# EAGLE board CT_schematic (EAGLE 7.6.0)

Size 100 x 80 mm. Coordinates in mm from the lower left corner, seen from the top.
Outline: 0,0 100,0 100,80 0,80 0,0
Copper layers (1*16): Top 0.035mm / dielectric 1.5mm / Bottom 0.035mm
Design rules "default": minimum track width 10mil, minimum drill 24mil, track to track 8mil, track to pad 8mil, pad to pad 8mil, via to via 8mil, smd to smd 8mil, copper to edge 40mil, drill to drill 8mil, minimum pad ring 10mil, minimum via ring 8mil, stop-mask expansion 4mil, vias tented up to drill 0mil, thermal gap 10mil

## Footprints (pad centres in the part's own frame; a part is rotated, then mirrored left to right if it is on the bottom)
C0603 = smd 0.8 x 0.8: 1 -0.762,0; 2 0.762,0
C0402 = smd 0.5 x 0.5: 1 -0.508,0; 2 0.508,0
C0805 = smd 1.2 x 1.3: 1 -1.016,0; 2 1.016,0
C1206 = smd 1.3 x 1.6: 1 -1.524,0; 2 1.524,0
L0603 = smd 0.8 x 0.8: 1 -0.762,0; 2 0.762,0
L1210 = smd 1.2 x 2.5: 1 -1.524,0; 2 1.524,0
L0806 = smd 1.016 x 1.524: 1 -0.889,0; 2 0.889,0
R0603 = smd 0.8 x 0.8: 1 -0.762,0; 2 0.762,0
UFBGA100 = smd 0.28 x 0.28: A1 -2.75,2.75; A2 -2.25,2.75; A3 -1.75,2.75; A4 -1.25,2.75; A5 -0.75,2.75; A6 -0.25,2.75; A7 0.25,2.75; A8 0.75,2.75; A9 1.25,2.75; A10 1.75,2.75; A11 2.25,2.75; A12 2.75,2.75; B1 -2.75,2.25; B2 -2.25,2.25; B3 -1.75,2.25; B4 -1.25,2.25; B5 -0.75,2.25; B6 -0.25,2.25; B7 0.25,2.25; B8 0.75,2.25; B9 1.25,2.25; B10 1.75,2.25; B11 2.25,2.25; B12 2.75,2.25; C1 -2.75,1.75; C2 -2.25,1.75; C3 -1.75,1.75; C4 -1.25,1.75; C5 -0.75,1.75; C8 0.75,1.75; C9 1.25,1.75; C10 1.75,1.75; C11 2.25,1.75; C12 2.75,1.75; D1 -2.75,1.25; D2 -2.25,1.25; D3 -1.75,1.25; D10 1.75,1.25; D11 2.25,1.25; D12 2.75,1.25; E1 -2.75,0.75; E2 -2.25,0.75; E3 -1.75,0.75; E10 1.75,0.75; E11 2.25,0.75; E12 2.75,0.75; F1 -2.75,0.25; F2 -2.25,0.25; F11 2.25,0.25; F12 2.75,0.25; G1 -2.75,-0.25; G2 -2.25,-0.25; G11 2.25,-0.25; G12 2.75,-0.25; H1 -2.75,-0.75; H2 -2.25,-0.75; H3 -1.75,-0.75; H10 1.75,-0.75; H11 2.25,-0.75; H12 2.75,-0.75; J1 -2.75,-1.25; J2 -2.25,-1.25; J3 -1.75,-1.25; J10 1.75,-1.25; J11 2.25,-1.25; J12 2.75,-1.25; K1 -2.75,-1.75; K2 -2.25,-1.75; K3 -1.75,-1.75; K4 -1.25,-1.75; K5 -0.75,-1.75; K8 0.75,-1.75; K9 1.25,-1.75; K10 1.75,-1.75; K11 2.25,-1.75; K12 2.75,-1.75; L1 -2.75,-2.25; L2 -2.25,-2.25; L3 -1.75,-2.25; L4 -1.25,-2.25; L5 -0.75,-2.25; L6 -0.25,-2.25; L7 0.25,-2.25; L8 0.75,-2.25; L9 1.25,-2.25; L10 1.75,-2.25; L11 2.25,-2.25; L12 2.75,-2.25; M1 -2.75,-2.75; M2 -2.25,-2.75; M3 -1.75,-2.75; M4 -1.25,-2.75; M5 -0.75,-2.75; M6 -0.25,-2.75; M7 0.25,-2.75; M8 0.75,-2.75; M9 1.25,-2.75; M10 1.75,-2.75; M11 2.25,-2.75; M12 2.75,-2.75
SAMTEC_FTSH-105-01-L-DV-K = smd 0.762 x 2.794: 1 -2.54,-2.032; 2 -2.54,2.032; 3 -1.27,-2.032; 4 -1.27,2.032; 5 0,-2.032; 6 0,2.032; 7 1.27,-2.032; 8 1.27,2.032; 9 2.54,-2.032; 10 2.54,2.032
SSOP-20 = smd 1.651 x 0.432: 1 -3.48,2.925; 2 -3.48,2.275; 3 -3.48,1.625; 4 -3.48,0.975; 5 -3.48,0.325; 6 -3.48,-0.325; 7 -3.48,-0.975; 8 -3.48,-1.625; 9 -3.48,-2.275; 10 -3.48,-2.925; 11 3.48,-2.925; 12 3.48,-2.275; 13 3.48,-1.625; 14 3.48,-0.975; 15 3.48,-0.325; 16 3.48,0.325; 17 3.48,0.975; 18 3.48,1.625; 19 3.48,2.275; 20 3.48,2.925
182-009-MALE = drill 1.194 pad 1.524 octagon: 1 -5.537,10.923; 2 -2.769,10.923; 3 0,10.923; 4 2.769,10.923; 5 5.537,10.923; 6 -4.153,8.08; 7 -1.384,8.08; 8 1.384,8.08; 9 4.153,8.08 | hole 3.048: -12.446,9.501; 12.446,9.501
TDFN-8/6MM = smd 0.3 x 0.75: 1 0,0; 2 0.5,0; 3 1,0; 4 1.5,0; 5 1.5,3; 6 1,3; 7 0.5,3; 8 0,3
FCI_10118193-0001LF = smd 0.4 x 1.35: 1 -1.3,2.675; 2 -0.65,2.675; 3 0,2.675; 4 0.65,2.675; 5 1.3,2.675 | smd 1.6 x 1.4: 6 -3.2,2.45; 7 3.2,2.45 | smd 1.9 x 1.9: 8 -1.2,0; 9 1.2,0 | hole 0.5: -3.3,0; 3.3,0
SOT143B = smd 1 x 0.7: 1 -0.75,-1 | smd 0.6 x 0.7: 2 0.95,-1; 3 0.95,1; 4 -0.95,1
ASEK = smd 1.4 x 1: 1 -1.1,-0.8; 2 1.1,-0.8; 3 1.1,0.8; 4 -1.1,0.8
ASFL1 = smd 1.7 x 1.5: 1 -1.27,-1.1; 2 1.27,-1.1; 3 1.27,1.1; 4 -1.27,1.1
TSOT-23-5 = smd 1.3 x 0.62: 1 -1.31,0.95; 2 -1.31,0; 3 -1.31,-0.95; 4 1.31,-0.95; 5 1.31,0.95
DFN8_2X3MC = smd 0.813 x 0.305: 1 -1.398,0.75; 2 -1.398,0.25; 3 -1.398,-0.25; 4 -1.398,-0.75; 5 1.398,-0.75; 6 1.398,-0.25; 7 1.398,0.25; 8 1.398,0.75 | smd 1.753 x 1.549: 9 0,0
JST-2-SMD = smd 1 x 4.6: 1 -1,-3.7; 2 1,-3.7 | smd 1.6 x 3.4: NC1 -3.4,1.5; NC2 3.4,1.5
SON-6 = smd 0.55 x 0.3: 1 -0.355,0.5 | smd 0.52 x 0.3: 2 -0.37,0; 3 -0.37,-0.5; 4 0.37,-0.5; 5 0.37,0; 6 0.37,0.5
SW_4-1437565-2 = smd 1.4 x 2.1: 1 -2.23,4.55; 2 -2.23,-4.55; 3 2.23,4.55; 4 2.23,-4.55
LGM67K-G1J2-24-Z = smd 0.8 x 1.4: A -2,0; C 0,0
NC7SZ125M5X = smd 1.3 x 0.7: 1 -1.3,0.95; 2 -1.3,0; 3 -1.3,-0.95; 4 1.3,-0.95; 5 1.3,0.95

## Placement (x,y rotation side)
C1  1e-07  [C0603]  -48.26,71.12 0 top  (outside the outline)
C2  1e-07  [C0603]  -52.07,71.12 0 top  (outside the outline)
C3  1e-07  [C0603]  -55.88,71.12 0 top  (outside the outline)
C4  1e-07  [C0603]  -59.69,71.12 0 top  (outside the outline)
C5  1e-07  [C0603]  -63.5,71.12 0 top  (outside the outline)
C6  4.7e-06  [C0603]  -44.45,71.12 0 top  (outside the outline)
C7  1e-07  [C0603]  -67.31,71.12 0 top  (outside the outline)
C8  1e-08  [C0603]  -71.12,71.12 0 top  (outside the outline)
C9  1e-06  [C0603]  -15.24,76.2 0 top  (outside the outline)
C10  1e-07  [C0402]  -60.96,76.2 0 top  (outside the outline)
C11  1e-06  [C0603]  -19.05,76.2 0 top  (outside the outline)
C12  1e-06  [C0603]  -22.86,76.2 0 top  (outside the outline)
C13  1e-06  [C0603]  -26.67,76.2 0 top  (outside the outline)
C14  4.7e-06  [C0805]  -53.34,60.96 0 top  (outside the outline)
C15  1e-08  [C0402]  -64.77,76.2 0 top  (outside the outline)
C16  1e-08  [C0402]  -68.58,76.2 0 top  (outside the outline)
C17  1e-08  [C0402]  -72.39,76.2 0 top  (outside the outline)
C18  1e-05  [C0805]  -58.42,60.96 0 top  (outside the outline)
C19  1e-05  [C0805]  -63.5,60.96 0 top  (outside the outline)
C20  1e-07  [C0402]  -15.24,81.28 0 top  (outside the outline)
C21  1e-05  [C1206]  -22.86,60.96 0 top  (outside the outline)
C22  1e-05  [C1206]  -29.21,60.96 0 top  (outside the outline)
C23  1e-08  [C0402]  -19.05,81.28 0 top  (outside the outline)
C24  1e-08  [C0402]  -22.86,81.28 0 top  (outside the outline)
F1  240.0  [L0603]  -30.48,76.2 0 top  (outside the outline)
I1  1.5e-05  [L1210]  -16.51,60.96 0 top  (outside the outline)
I2  3.3e-06  [L0806]  -35.56,60.96 0 top  (outside the outline)
R2  1000.0  [R0603]  -34.29,76.2 0 top  (outside the outline)
R4  4700.0  [R0603]  -38.1,76.2 0 top  (outside the outline)
R5  2200.0  [R0603]  -41.91,76.2 0 top  (outside the outline)
R6  2200.0  [R0603]  -45.72,76.2 0 top  (outside the outline)
R7  10000.0  [R0603]  -52.07,66.04 0 top  (outside the outline)
R8  10000.0  [R0603]  -57.15,66.04 0 top  (outside the outline)
R9  10000.0  [R0603]  -62.23,66.04 0 top  (outside the outline)
R10  10000.0  [R0603]  -67.31,66.04 0 top  (outside the outline)
R11  10000.0  [R0603]  -72.39,66.04 0 top  (outside the outline)
R12  5.0  [R0603]  -49.53,76.2 0 top  (outside the outline)
R13  100000.0  [R0603]  -21.59,66.04 0 top  (outside the outline)
R14  100000.0  [R0603]  -26.67,66.04 0 top  (outside the outline)
R15  100000.0  [R0603]  -31.75,66.04 0 top  (outside the outline)
R16  10000.0  [R0603]  -15.24,71.12 0 top  (outside the outline)
R17  10000.0  [R0603]  -20.32,71.12 0 top  (outside the outline)
R18  10000.0  [R0603]  -25.4,71.12 0 top  (outside the outline)
R19  220000.0  [R0603]  -36.83,66.04 0 top  (outside the outline)
R20  1000000.0  [R0603]  -16.51,66.04 0 top  (outside the outline)
R21  10000.0  [R0603]  -30.48,71.12 0 top  (outside the outline)
R22  10000.0  [R0603]  -35.56,71.12 0 top  (outside the outline)
R23  9100.0  [R0603]  -53.34,76.2 0 top  (outside the outline)
R24  680000.0  [R0603]  -41.91,66.04 0 top  (outside the outline)
R25  120000.0  [R0603]  -46.99,66.04 0 top  (outside the outline)
R26  2000.0  [R0603]  -57.15,76.2 0 top  (outside the outline)
R27  10000.0  [R0603]  -40.64,71.12 0 top  (outside the outline)
U1  STM32L152V8H6  [UFBGA100]  -25.4,43.18 0 top  (outside the outline)
U2  FTSH-105-01-L-DV-K  [SAMTEC_FTSH-105-01-L-DV-K]  -35.56,30.48 0 top  (outside the outline)
U3  MAX3218EAP+T  [SSOP-20]  -66.04,41.91 0 top  (outside the outline)
U4  182-009-113R531  [182-009-MALE]  -36.83,6.35 0 top  (outside the outline)
U5  24AA128T-I/MNY  [TDFN-8/6MM]  -57.15,41.91 0 top  (outside the outline)
U6  10118193-0001LF  [FCI_10118193-0001LF]  -35.56,52.07 0 top  (outside the outline)
U7  prtr5v0u2ax  [SOT143B]  -35.56,81.28 0 top  (outside the outline)
U8  ASEK-32.768KHz-ECST  [ASEK]  -57.15,53.34 0 top  (outside the outline)
U9  ASFL1-25MHZ-NCS  [ASFL1]  -26.67,53.34 0 top  (outside the outline)
U10  ltc3406es5  [TSOT-23-5]  -68.58,59.69 0 top  (outside the outline)
U11  MCP73831T-2ACI/MC  [DFN8_2X3MC]  -45.72,80.01 0 top  (outside the outline)
U12  S2B-PH-SM4-TB(LF)(SN)  [JST-2-SMD]  -39.37,44.45 0 top  (outside the outline)
U13  TPS3895ADRYR  [SON-6]  -39.37,80.01 0 top  (outside the outline)
U14  4-1437565-2  [SW_4-1437565-2]  -57.15,27.94 0 top  (outside the outline)
U15  Q65110A2395  [LGM67K-G1J2-24-Z]  -64.77,52.07 0 top  (outside the outline)
U16  nc7sz125m5x  [NC7SZ125M5X]  -40.64,59.69 0 top  (outside the outline)
U17  nc7sz125m5x  [NC7SZ125M5X]  -46.99,59.69 0 top  (outside the outline)

## Library data of the parts
C1-C24 F1 I1 I2 R2 R4-R27 U1-U17 = circuit_tree

## Nets
CLK_U1_D1: U1.D1 U8.3
CLK_U1_F1: U1.F1 U9.3
GND: C1.2 C2.2 C3.2 C4.2 C5.2 C6.2 C7.2 C8.2 C9.2 C10.2 C11.2 C12.2 C13.2 C15.2 C16.2 C17.2 C18.2 C19.1 C19.2 C20.2 C21.2 C22.2 C23.2 C24.2 R2.2 R7.2 R11.2 R12.2 R16.2 R18.2 R19.2 R23.2 R25.2 R26.2 U1.D3 U1.E3 U1.F2 U1.F11 U1.F12 U1.J1 U1.K1 U2.3 U2.5 U3.5 U3.17 U3.20 U4.5 U5.4 U5.7 U6.5 U6.6 U6.7 U6.8 U6.9 U7.1 U8.2 U9.2 U10.2 U11.6 U11.9 U12.2 U13.2 U15.C U16.2 U16.3 U17.1 U17.3
INPUT_USBPOWER_5V: C21.1 R27.2 U6.1 U7.4 U11.1 U11.2
NET_U1_A3: R5.1 U1.A3 U5.6
NET_U1_A4: R7.1 U1.A4
NET_U1_B3: R6.1 U1.B3 U5.5
NET_U1_E2: C7.1 U1.E2
NET_U1_H2: R4.1 U1.H2 U17.4
NET_U1_M1: C8.1 C9.1 F1.1 U1.L1 U1.M1
NET_U1_M11: U15.A
NET_U1_M12: U14.3 U14.4
NET_U2_9: R12.1 U2.9
NET_U3_1: I1.1 U3.1
NET_U3_2: R13.1 U3.2
NET_U3_3: R14.1 U3.3
NET_U3_4: R15.1 U3.4
NET_U3_15: C13.1 U3.15
NET_U3_16: C14.2 U3.16
NET_U3_18: C14.1 U3.18
NET_U3_19: C12.1 U3.19
NET_U4_2: U3.12 U4.2
NET_U4_3: U3.14 U4.3
NET_U4_7: U3.11 U4.7
NET_U4_8: U3.13 U4.8
NET_U5_1: R16.1 U5.1
NET_U5_2: R17.1 U5.2
NET_U5_3: R18.1 U5.3
NET_U10_1: U10.1
NET_U10_3: I2.1 U10.3
NET_U10_5: R19.1 R20.1 U10.5
NET_U10_ATNET_3: I2.2 R20.2
NET_U11_5: R27.1 U11.5
NET_U11_8: R26.1 U11.8
NET_U13_1: R22.1 R23.1 U13.1
NET_U13_3: R24.2 R25.1 U13.3
NET_U13_4: R21.1 U13.4 U16.4 U17.2
NET_U14_1: R2.1 U14.1 U14.2
PROC_SYS_JTCK_SWCLK: R11.1 U1.A10 U2.4
PROC_SYS_JTDI: R9.1 U1.A9 U2.8
PROC_SYS_JTDO_TRACESWO: U1.A8 U2.6
PROC_SYS_JTMS_SWDIO: R10.1 U1.A11 U2.2
PROC_USART2_CTS: U1.B8 U3.8
PROC_USART2_RTS: U1.B7 U3.10
PROC_USART2_RX: U1.B6 U3.9
PROC_USART2_TX: U1.A6 U3.7
PROC_USB_DM: U1.B12 U6.2 U7.3
PROC_USB_DP: U1.A12 U6.3 U7.2
RST_OUT_U2_JTAG_RST_B: R8.1 U2.10 U16.1
VCC_S1_3V7: C18.1 C22.1 U10.4 U11.3 U11.4 U12.1
VCC_TIER1_3V3: C1.1 C2.1 C3.1 C4.1 C5.1 C6.1 C10.1 C11.1 C15.1 C16.1 C17.1 C19.2 C20.1 C23.1 C24.1 F1.2 I1.2 I2.2 R4.2 R5.2 R6.2 R8.2 R9.2 R10.2 R13.2 R14.2 R15.2 R17.2 R20.2 R21.2 R22.2 R24.1 U1.C4 U1.G2 U1.G11 U1.G12 U1.H3 U2.1 U3.6 U5.8 U8.4 U9.4 U13.6 U16.5 U17.5

## Tracks (layer width: path | path; a pad name or v marks a point on that pad's centre or on a via)
CLK_U1_D1  (1 unrouted)
CLK_U1_F1  (1 unrouted)
GND  (66 unrouted)
INPUT_USBPOWER_5V  (5 unrouted)
NET_U1_A3  (2 unrouted)
NET_U1_A4  (1 unrouted)
NET_U1_B3  (2 unrouted)
NET_U1_E2  (1 unrouted)
NET_U1_H2  (2 unrouted)
NET_U1_M1  (4 unrouted)
NET_U1_M12  (1 unrouted)
NET_U2_9  (1 unrouted)
NET_U3_1  (1 unrouted)
NET_U3_2  (1 unrouted)
NET_U3_3  (1 unrouted)
NET_U3_4  (1 unrouted)
NET_U3_15  (1 unrouted)
NET_U3_16  (1 unrouted)
NET_U3_18  (1 unrouted)
NET_U3_19  (1 unrouted)
NET_U4_2  (1 unrouted)
NET_U4_3  (1 unrouted)
NET_U4_7  (1 unrouted)
NET_U4_8  (1 unrouted)
NET_U5_1  (1 unrouted)
NET_U5_2  (1 unrouted)
NET_U5_3  (1 unrouted)
NET_U10_3  (1 unrouted)
NET_U10_5  (2 unrouted)
NET_U10_ATNET_3  (1 unrouted)
NET_U11_5  (1 unrouted)
NET_U11_8  (1 unrouted)
NET_U13_1  (2 unrouted)
NET_U13_3  (2 unrouted)
NET_U13_4  (3 unrouted)
NET_U14_1  (2 unrouted)
PROC_SYS_JTCK_SWCLK  (2 unrouted)
PROC_SYS_JTDI  (2 unrouted)
PROC_SYS_JTDO_TRACESWO  (1 unrouted)
PROC_SYS_JTMS_SWDIO  (2 unrouted)
PROC_USART2_CTS  (1 unrouted)
PROC_USART2_RTS  (1 unrouted)
PROC_USART2_RX  (1 unrouted)
PROC_USART2_TX  (1 unrouted)
PROC_USB_DM  (2 unrouted)
PROC_USB_DP  (2 unrouted)
RST_OUT_U2_JTAG_RST_B  (2 unrouted)
VCC_S1_3V7  (5 unrouted)
VCC_TIER1_3V3  (44 unrouted)